# Altium PCB PCB1.PcbDoc
Units mm, origin at the board's own origin, x right, y up, seen from the top; angles counter-clockwise.
Board outline 111 x 15.9 mm, 2 copper layers (Top Layer, Bottom Layer); 2 components, 3 nets, 6 pads, 0 vias.
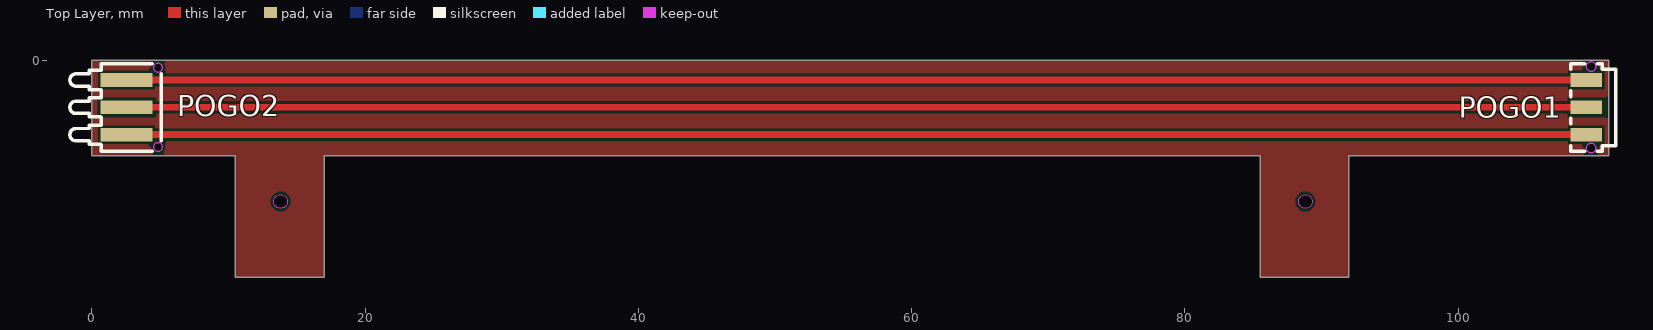
[diagram p0: Top Layer view]
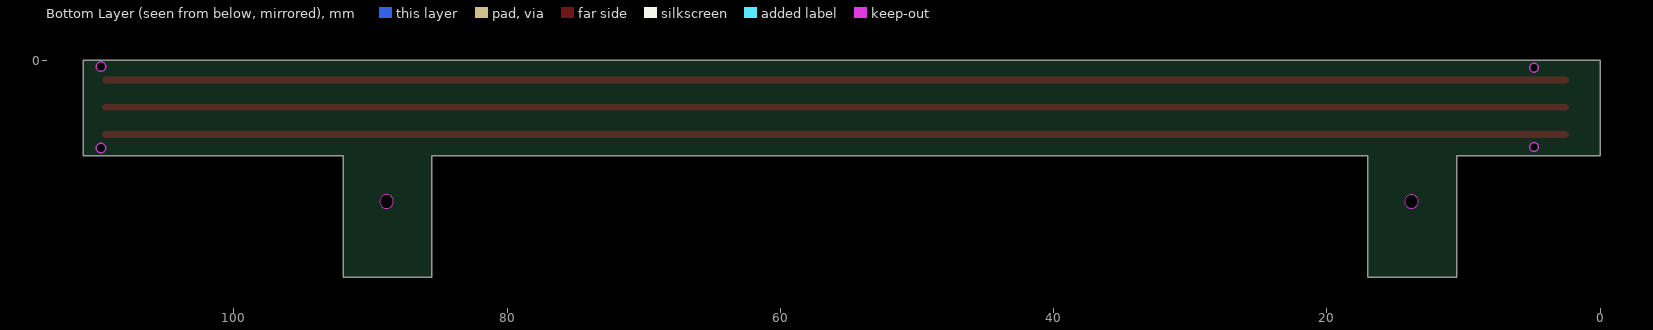
[diagram p1: Bottom Layer view, seen from below]

## Layer stack, top to bottom
Top Solder: solder mask 0.0102, Solder Resist, Dk 3.5
Top Layer: signal copper 0.0356
Dielectric 1: dielectric 0.32, FR-4, Dk 4.8
Bottom Layer: signal copper 0.0356
Bottom Solder: solder mask 0.0102, Solder Resist, Dk 3.5

## Board outline
92,-15.9 92,-7 111,-7 111,0 0,0 0,-7 10.5,-7 10.5,-15.9 17,-15.9 17,-7 85.5,-7 85.5,-15.9
cut-out: 13.816,-9.843 cw(c13.816,-10.342) 13.816,-10.843 cw(c13.816,-10.343)
cut-out: 89.316,-10.343 cw(c88.816,-10.343) 88.316,-10.343 cw(c88.816,-10.343)

## Design rules (kind name [scope] priority, off if disabled: settings)
Clearance Clearance_4 [InNamedPolygon('NETPOGO1_2_L01_P001')] p1: gap=0.2 ignorepadtopadclearanceinfootprint=FALSE
Clearance [All] p2: gap=0.01 ignorepadtopadclearanceinfootprint=FALSE
PolygonConnect [All] p1: connectstyle=NoConnect reliefconductorwidth=0.254 reliefentries=4 polygonreliefangle="90 Angle" airgapwidth=0.254
RoutingVias [All] p1: holewidth=0.711 width=1.27 viastyle="Through Hole" minholewidth=0.711 minwidth=1.27 maxholewidth=0.711 maxwidth=1.27
SilkToSolderMaskClearance [IsPad] p1: minsilkscreentomaskgap=0.01 clearancetoexposedcopper=TRUE
SolderMaskExpansion [All] p1: expansion=0.102 istentingtop=FALSE
SupplyNets "Schematic Supply Nets_1" [InNet('NetLabel1')] p1: voltage=0.000
Width [All] p1: maxlimit=2.54 minlimit=0.254 preferedwidth=0.254
29 further rules are at their usual default settings.

## Components (designator, comment, footprint, x,y, rotation, side; value= is the part's Value field where it differs from the comment)
POGO1 "PogoConnectorFemale" PogoConnectorFemale 109.375,-3.45 r0 top
POGO2 "YZ104614067F-03020-02" YZ104614067F-03020-02 2.55,-3.45 r0 top

## Footprints (in the part's own frame and the unit in brackets; to place one, negate y for a bottom-side part, rotate by r counter-clockwise, add the part's x,y. Pads: shape width x height; smd on the part's side, far side on the other; paste and mask are expansions set on the pad)
PogoConnectorFemale [mm] "Pogo pin connector, Pitch 2mm, SMD, Rectangular Angle, 3 Pins, Female"
  rect 2.3x1 smd: 1(0,2) 2(0,0) 3(0,-2)
  Keep-Out Layer board cut-out: 0.7,-2.98 0.665,-3.132 0.568,-3.254 0.428,-3.321 0.272,-3.321 0.132,-3.254 0.035,-3.132 0,-2.98 0,-2.98 0.035,-2.828 0.132,-2.706 0.272,-2.639 0.428,-2.639 0.568,-2.706 0.665,-2.828 0.7,-2.98
  Keep-Out Layer board cut-out: 0.7,2.98 0.665,2.828 0.568,2.706 0.428,2.639 0.272,2.639 0.132,2.706 0.035,2.828 0,2.98 0,2.98 0.035,3.132 0.132,3.254 0.272,3.321 0.428,3.321 0.568,3.254 0.665,3.132 0.7,2.98
  Keep-Out Layer circle w0.005: c0.35,-2.98 r0.35
  Keep-Out Layer circle w0.005: c0.35,2.98 r0.35
  Keep-Out Layer region: 0.7,-2.98 0.665,-3.132 0.568,-3.254 0.428,-3.321 0.272,-3.321 0.132,-3.254 0.035,-3.132 0,-2.98 0,-2.98 0.035,-2.828 0.132,-2.706 0.272,-2.639 0.428,-2.639 0.568,-2.706 0.665,-2.828 0.7,-2.98
  Keep-Out Layer region: 0.7,2.98 0.665,2.828 0.568,2.706 0.428,2.639 0.272,2.639 0.132,2.706 0.035,2.828 0,2.98 0,2.98 0.035,3.132 0.132,3.254 0.272,3.321 0.428,3.321 0.568,3.254 0.665,3.132 0.7,2.98
  silkscreen extent -1.15,-3.2 2.17,3.2
YZ104614067F-03020-02 [mm] "Pogo pin connector, Pitch 2mm, SMD, Rectangular Angle, 3 Pins, Male"
  rect 3.8x1 smd paste+0 mask+0.05: 1(0,-2) 2(0,0) 3(0,2)
  Keep-Out Layer board cut-out: 2.625,-2.9 2.593,-3.041 2.503,-3.154 2.372,-3.217 2.228,-3.217 2.097,-3.154 2.007,-3.041 1.975,-2.9 1.975,-2.9 2.007,-2.759 2.097,-2.646 2.228,-2.583 2.372,-2.583 2.503,-2.646 2.593,-2.759 2.625,-2.9
  Keep-Out Layer board cut-out: 2.625,2.9 2.593,2.759 2.503,2.646 2.372,2.583 2.228,2.583 2.097,2.646 2.007,2.759 1.975,2.9 1.975,2.9 2.007,3.041 2.097,3.154 2.228,3.217 2.372,3.217 2.503,3.154 2.593,3.041 2.625,2.9
  Keep-Out Layer circle w0.005: c2.3,-2.9 r0.325
  Keep-Out Layer circle w0.005: c2.3,2.9 r0.325
  Keep-Out Layer region: 2.625,-2.9 2.593,-3.041 2.503,-3.154 2.372,-3.217 2.228,-3.217 2.097,-3.154 2.007,-3.041 1.975,-2.9 1.975,-2.9 2.007,-2.759 2.097,-2.646 2.228,-2.583 2.372,-2.583 2.503,-2.646 2.593,-2.759 2.625,-2.9
  Keep-Out Layer region: 2.625,2.9 2.593,2.759 2.503,2.646 2.372,2.583 2.228,2.583 2.097,2.646 2.007,2.759 1.975,2.9 1.975,2.9 2.007,3.041 2.097,3.154 2.228,3.217 2.372,3.217 2.503,3.154 2.593,3.041 2.625,2.9
  silkscreen extent -4.15,-3.2 2.55,3.2

## Part data
POGO2: "Pogo pin connector, Pitch 2mm, SMD, Rectangular Angle, 3 Pins, Male", Manufacturer Part Number=YZ104614067F-03020-02

## Nets (pads, with @x,y where several pads share a name; then routed paths per layer and width w, separated by ;. In a path a pad name is that pad's centre, name@x,y a point inside that pad or via, vN(x,y) a via of type N, cw(c..) or ccw(c..) an arc to the next point about the centre after c; other vN are vias at no path point)
NetPOGO1_1: POGO1.1 POGO2.3 | length 106.8
  Top Layer w0.5: POGO2.3 POGO1.1
NetPOGO1_2: POGO1.2 POGO2.2 | length 106.8
  Top Layer w0.5: POGO2.2 POGO1.2
NetPOGO1_3: POGO1.3 POGO2.1 | length 106.8
  Top Layer w0.5: POGO2.1 POGO1.3

## Polygon pours and split planes (outlines as drawn)
NetPOGO1_2 on Top Layer "NETPOGO1_2_L01_P001" (solid, pour order 1): 0,0 0,-7 10.5,-7 10.5,-15.9 17,-15.9 17,-7 85.5,-7 85.5,-15.9 92,-15.9 92,-7 111,-7 111,0

## Silkscreen, mask and mechanical layers (free items; w line width, h text height)
Board Shape:
  the board outline again, w0.2
Mechanical 6:
  circle w0.5: c13.816,-10.343 r0.25
  circle w0.5: c88.816,-10.343 r0.25